# Altium PCB PCB1.PcbDoc (part 2 of 2)
Units mm, origin at the board's own origin, x right, y up, seen from the top; angles counter-clockwise.
Board outline 48 x 73.5 mm, 4 copper layers (Top Copper, Signal Layer 1, Signal Layer 2, Bottom Copper), stack 1.582 mm thick; 72 components, 51 nets, 278 pads, 725 vias.
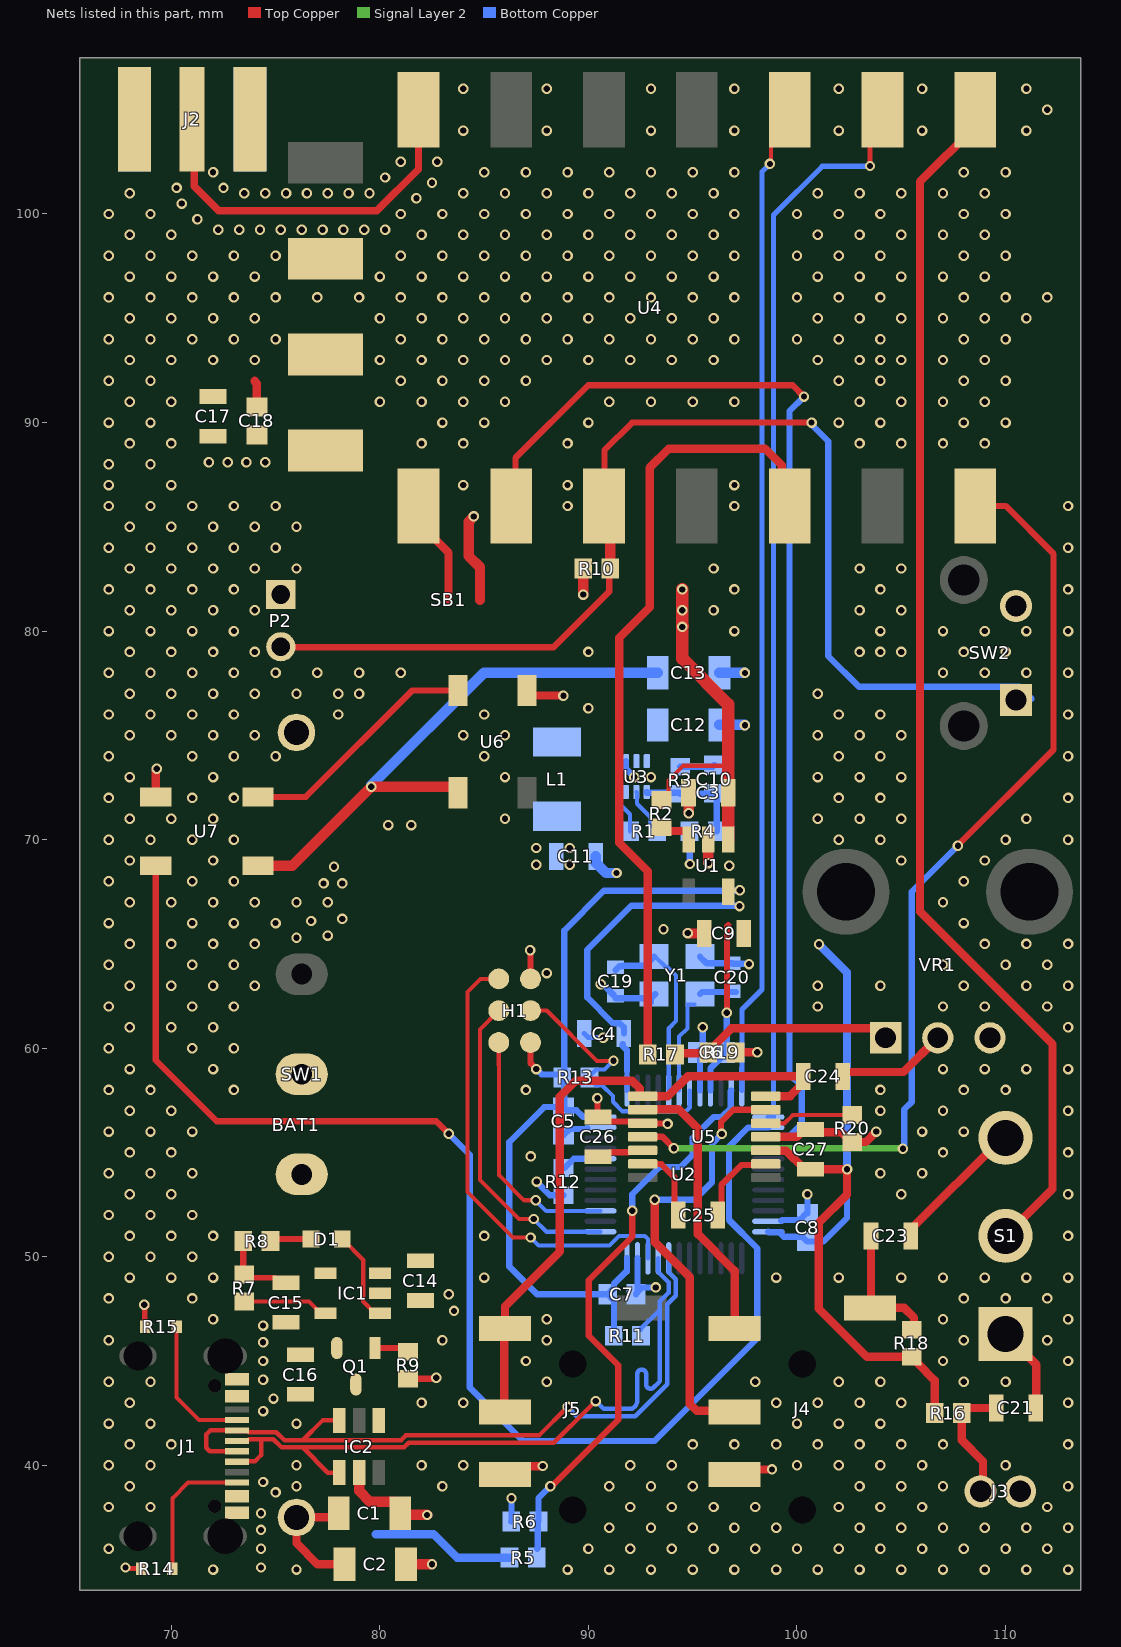
[diagram p4: the nets of this part, all layers, seen from the top]

## Via types
v1: diameter 0.5, hole 0.3, Top Copper to Bottom Copper, tented both sides, 725 vias

## Nets (pads, with @x,y where several pads share a name; then routed paths per layer and width w, separated by ;. In a path a pad name is that pad's centre, name@x,y a point inside that pad or via, vN(x,y) a via of type N, cw(c..) or ccw(c..) an arc to the next point about the centre after c; other vN are vias at no path point)
+3V3: C4.2 C5.2 C6.2 C7.2 C8.2 C9.2 C27.1 H1.1 R11.2 R13.2 R16.2 R18.1 U1.5 U2.1 U2.9 U2.24 U2.36 U2.48 U5.10 | length 103.7
  Top Copper w0.3: H1.1@87.224,60.276 87.224,59.276 v1(87.5,59) ; v1@96.639,61.707 96.639,65.839 96.7,65.9
  Top Copper w0.4: C9.2@97.336,65.85 97.336,65.764 C9.2@97.6,65.5 ; U5.10@98.51,55.09 99.46,55.09 100.35,54.2 C27.1@100.65,54.2 v1(102.4,54.2) 102.4,52.973 101.039,51.613 101.039,47.519 103.358,45.2 R18.1@105.5,45.2 ; R18.1@105.5,45.175 105.575,45.175 105.775,44.975 105.775,44.9 106.6,44.075 R16.2@106.6,42.5
  Bottom Copper w0.25: U2.1@91.85,57.975 91.85,58.9
  Bottom Copper w0.3: v1(87.5,59) 87.759,58.741 88.609,58.741 R13.2@88.75,58.6 ; U2.48@90.575,56.7 89.744,56.7 89.425,57.019 88.956,57.019 C5.2@88.8,57.175 ; R11.2@91.215,46.213 91.223,46.221 91.223,47.902 C7.2@90.925,48.2 ; C4.2@91.65,60.202 91.65,60.1 91.85,59.9 91.85,59.675 91.854,59.671 91.854,59.129 91.85,59.125 91.85,58.9 ; C4.2@91.7,60.7 91.7,61 91.5,61.2 91.171,61.2 89.938,62.433 89.938,64.713 92.062,66.836 97.22,66.836 v1(97.242,66.814) ; U2.36@91.85,49.925 91.85,49.325 91.225,48.7 91.225,48.5 C7.2@90.925,48.2 ; U2.9@95.85,57.975 95.85,59.025 96.575,59.75 C6.2@96.575,59.8 96.636,59.861 v1(96.636,61.704) ; v1(97.251,67.568) 97.227,67.544 90.744,67.544 88.838,65.638 88.838,58.65 88.838,57.213 C5.2@88.8,57.175 ; U2.24@98.625,51.2 98.65,51.175 99.25,51.175 99.25,51.077 99.364,50.963 100.262,50.963 C8.2@100.5,50.725 101.259,50.725 102.4,51.866 v1(102.4,54.2) ; C5.2@88.8,57.175 87.875,57.175 86.2,55.5 86.2,49.532 87.532,48.2 C7.2@90.925,48.2
  Bottom Copper w0.4: v1(101.056,64.978) 102.4,63.634 v1(102.4,54.2)
+5V: C3.2 C10.2 C12.2 C13.2 C17.2 C18.2 R2.1 R3.2 R10.2 U1.1 U3.6 U4.8 U6.1 U7.1 | length 47.4
  Top Copper w0.2: R2.1@93.5,71.9 93.506,71.9 93.831,72.225 93.831,72.831 94.54,73.54 96.7,73.54
  Top Copper w0.5: U7.1@74.15,68.75 75.803,68.75 v1(79.591,72.538) 83.55,72.538 83.75,72.338 U6.1@83.75,72.25 ; v1(89.75,81.75) R10.2@89.75,83
  Top Copper w0.6: v1(94.5,80.2) 94.5,78.682 96.7,76.482 96.7,73.54 C3.2@96.7,72.25 U1.1@96.7,70 ; v1(94.5,82) v1(94.5,81.004) 94.5,80.25 v1@94.525,80.225
  Bottom Copper w0.3: R3.2@94.4,73.5 95.958,73.5 C10.2@96.038,73.58
  Bottom Copper w0.5: v1(79.591,72.538) 79.591,72.599 84.992,78 C13.2@93.325,78
  other v1: 71.8,88.1 72.7,88.1 73.6,88.1 74.5,88.1
+VBATT: BAT1.1 C1.2 C2.2 C14.2 IC1.3 R5.2 SW1.3 | length 13.2
  Top Copper w0.4: C1.2@77.969,37.4 C1.2@78.19,37.62 ; C1.2@78.069,37.5 76.325,37.5 BAT1.1@76,37.5 76,36.268 77.018,35.25 C2.2@78.3,35.25
  Bottom Copper w0.4: 79.8,36.7 82.57,36.7 83.698,35.573 R5.2@86.218,35.573
+VUSB: C16.2 IC2.1 J1.A4-B9 J1.B4-A9 Q1.3
  other v1: 75,38.7 74.4,39.2 74.4,42.6 74.9,43.2
A_ATTEN: C24.1 J5.R1 J5.T U5.1 U5.14 | length 31.3
  Top Copper w0.4: J5.R1@85.959,42.594 85.959,46.509 J5.T@86,46.55 86,47.622 88.631,50.252 88.631,57.682 89.386,58.437 92.101,58.437 92.468,58.071 92.468,57.725 92.493,57.7 93.812,57.7 94.762,58.65 C24.1@100.15,58.65 ; U5.14@98.5,57.7 99.671,57.7 100.15,58.179 100.15,58.5 100.225,58.575 C24.1@100.3,58.65
ADC1_IN1: R5.1 R6.2 U2.11 | length 27.7
  Top Copper w0.3: v1@88.284,39.04 91.428,42.184 91.428,44.801 90.014,46.214 90.014,48.867 92.1,50.953 v1(92.1,52.2)
  Bottom Copper w0.3: R5.1@87.55,36 87.575,36.025 R6.2@87.575,37.3 ; R6.2@87.6,37.3 87.6,38.415 v1(88.176,38.992) ; v1(92.1,52.2) 92.1,53 93.4,54.3 94.4,54.3 95,54.9 95,55.7 96,56.7 96.4,56.7 96.825,57.125 96.825,57.95 U2.11@96.85,57.975
AMP_EN: U4.1 U5.4 | length 48.9
  Top Copper w0.3: U5.4@92.6,55.75 93.55,55.75 v1(94.1,55.2) ; v1@107.715,69.728 112.3,74.312 112.3,83.7 110,86 U4.1@108.55,86
  Signal Layer 2 w0.3: v1(94.1,55.2) 105.052,55.2 v1(105.079,55.173)
  Bottom Copper w0.3: v1(105.079,55.173) 105.117,55.211 105.117,55.352 105.146,55.381 105.146,57.065 105.503,57.421 105.503,67.495 v1(107.715,69.708)
ARGB_D: U2.14 U7.4 | length 66.3
  Top Copper w0.3: U7.4@69.25,68.75 69.25,59.425 72.174,56.501 82.699,56.501 v1(83.3,55.9)
  Bottom Copper w0.3: v1(83.3,55.9) 84.312,54.888 84.312,43.73 86.883,41.159 93.159,41.159 98.1,46.1 98.1,50.4 96.74,51.76 96.74,55.279 97.661,56.2 U2.14@98.625,56.2
BOOT0: R12.2 U2.44 | length 2
  Bottom Copper w0.3: R12.2@88.8,54.25 88.85,54.25 89.3,54.7 U2.44@90.575,54.7
CC1: J1.A5 R15.2 | length 6.8
  Top Copper w0.2: R15.2@70.25,46.65 70.25,43.25 71.33,42.17 J1.A5@73.155,42.17
CC2: J1.B5 R14.2 | length 6.8
  Top Copper w0.2: R14.2@70.05,35.05 70.05,38.415 70.805,39.17 J1.B5@73.155,39.17
D_N: IC2.3 J1.A7 J1.B7 U2.32 | length 34.5
  Top Copper w0.216: J1.A7@73.155,40.67 71.848,40.67 71.671,40.847 71.671,41.48 71.861,41.67 J1.B7@73.155,41.67 73.197,41.628 73.675,41.628 73.711,41.592 75.036,41.592 75.427,41.2 76.3,41.2 ; IC2.3@78.05,42.15 77.25,42.15 76.3,41.2 ; v1(89,42.8) 87.63,41.43 81.245,41.43 81.015,41.2 76.3,41.2
  Bottom Copper w0.216: v1(89,42.8) 89.445,42.355 90.636,42.355 90.638,42.357 92.242,42.357 93.772,43.886 93.772,47.719 94.184,48.131 94.184,48.923 93.867,49.24 93.867,49.249 93.85,49.266 U2.32@93.85,49.925
D_P: IC2.4 J1.A6 J1.B6 R11.1 U2.33 | length 35.9
  Top Copper w0.216: J1.B6@73.155,40.17 73.186,40.201 74.012,40.201 74.303,40.492 74.303,41.248 ; J1.A6@73.155,41.17 73.197,41.212 73.675,41.212 73.711,41.248 74.303,41.248 ; IC2.4@78.05,39.65 77.507,39.65 76.3,40.857 ; v1(90.348,43.079) 89.164,41.895 89.15,41.895 88.341,41.086 81.386,41.086 81.157,40.857 76.3,40.857 ; 74.303,41.248 74.894,41.248 75.285,40.857 76.3,40.857
  Bottom Copper w0.216: v1(90.348,43.079) 90.727,42.7 92.1,42.7 92.128,42.728 92.237,42.837 ccw(c91.98,43.092) 92.239,42.839 ccw(c91.98,43.092) 92.342,43.092 92.342,44.374 cw(c92.554,44.374) 92.554,44.586 cw(c92.554,44.374) 92.766,44.374 92.766,43.888 ccw(c92.982,43.888) 93.135,43.735 93.321,43.921 93.428,44.028 93.428,47.4 ; R11.1@92.508,46.489 92.508,46.539 93.369,47.4 93.428,47.4 ; U2.33@93.35,49.925 93.35,49.272 93.841,48.781 93.841,48.274 93.428,47.861 93.428,47.4
FET_Drain: C15.2 IC1.4 Q1.2 R7.1 R8.2 | length 3.6
  Top Copper w0.25: R7.1@73.5,49.15 73.656,48.994 74.956,48.994 75.1,48.85 C15.2@75.4,48.85
  Top Copper w0.3: R8.2@73.45,50.75 73.45,49.2 R7.1@73.5,49.15
FET_Gate: Q1.1 R9.2 | length 1.7
  Top Copper w0.2: R9.2@81.173,45.627 R9.2@81.35,45.45
  Top Copper w0.3: Q1.1@79.765,45.627 R9.2@81.173,45.627
GND: BAT1.2 C1.1 C2.1 C3.1 C4.1 C5.1 C6.1 C7.1 C8.1 C9.1 C11.1 C12.1 C13.1 C14.1 C15.1 C16.1 C17.1 C18.1 C19.1 C20.1 C26.2 C27.2 H1.3 IC1.2 IC2.5 J1.A1-B12 J1.B1-A12 J2.2 J2.3 J2.4 J2.5 J3.2 J4.R2 J5.R2 P2.1 R4.1 R6.1 R9.1 R12.1 R14.1 R15.1 R19.1 R20.1 SB1.3 SW2.2 U1.2 U2.8 U2.23 U2.35 U2.47 U3.4 U4.9 U4.10 U5.3 U5.11 U6.3 U7.3 VR1.3 Y1.2 Y1.4 | length 62.2
  Top Copper w0.25: v1(67.8,35.1) 67.85,35.05 R14.1@68.55,35.05 ; v1(68.7,47.7) 68.725,47.675 68.725,46.675 R15.1@68.75,46.65
  Top Copper w0.3: R9.1@81.35,44.15 82.65,44.15 v1(82.7,44.2) ; v1(87.2,64.7) 87.224,64.676 H1.3@87.224,63.324 ; v1(90.432,57.594) 90.432,56.718 C26.2@90.45,56.7 90.75,56.7 90.95,56.5 91.05,56.5 91.064,56.486 91.936,56.486 91.947,56.475 92.525,56.475 U5.3@92.6,56.4 92.616,56.384 93.778,56.384 v1(93.794,56.368)
  Top Copper w0.4: v1(68.7,47.7) v1@68.75,47.65 ; U7.3@69.25,72.05 69.25,73.35 v1(69.3,73.4) ; 74,92 74,91.973 74.1,91.873 C18.1@74.1,90.75 ; J5.R2@86,39.55 86.4,39.95 87.796,39.95 v1(87.811,39.965) ; U6.3@87.05,77.15 87.288,76.912 v1@88.788,76.912 ; R19.1@97.05,59.8 v1(98.1,59.8) ; J4.R2@97.493,39.393 97.9,39.8 v1(98.802,39.8) ; U5.11@98.501,55.749 99.999,55.749 100.35,56.1 C27.2@100.65,56.1 100.784,55.966 102.134,55.966 102.6,55.5 R20.1@102.65,55.5 103.3,55.5 v1(103.8,56)
  Top Copper w0.5: IC2.5@79,39.65 79,38.772 79.522,38.25 80.7,38.25 80.975,37.975 C1.1@80.975,37.7 ; C1.1@81.14,37.62 82.258,37.62 v1(82.263,37.614) ; C2.1@81.25,35.25 v1(82.5,35.25) ; v1(84.5,85.5) 84.254,85.254 84.254,83.6 84.8,83.054 SB1.3@84.8,81.5 ; v1(94.763,65.518) 94.781,65.5 C9.1@95.55,65.5 ; C3.1@94.8,72.25 94.8,71.266 v1(94.804,71.262) ; U1.2@95.75,70 95.75,68.883 v1(95.758,68.875)
  Bottom Copper w0.25: C4.1@89.8,60.7 89.987,60.513 90.687,60.513 v1(90.7,60.5)
  Bottom Copper w0.3: R6.1@86.3,37.3 86.305,37.305 86.305,38.413 v1(86.31,38.418) ; v1(87.516,53.604) 87.516,53.582 88.148,52.95 R12.1@88.8,52.95 ; C5.1@88.8,55.825 89.1,56.125 89.9,56.125 U2.47@89.95,56.175 ; v1(90.595,63.076) 90.633,63.038 90.712,63.038 C19.1@91.225,62.525 ; C19.1@91.3,62.4 Y1.2@92.8,62.4 ; U3.4@91.8,73.765 91.8,73.4 v1(92.2,73) ; C7.1@92.275,48.2 92.275,48.227 C7.1@92.35,48.302 ; U2.35@92.35,49.925 C7.1@92.35,48.302 ; Y1.2@92.9,62.3 93,62.2 93,62.4 Y1.2@93.2,62.6 ; v1(93.229,48.527) 92.575,48.527 C7.1@92.35,48.302 ; R4.1@94.85,70.4 94.858,70.392 94.858,68.84 v1(94.865,68.833) ; Y1.4@95.344,64.393 95.662,64.075 96.332,64.075 C20.1@96.9,64.075 ; U2.8@95.35,57.975 95.35,59.675 C6.1@95.225,59.8 95.476,60.051 v1(95.476,61.008) ; C20.1@96.915,64.06 96.92,64.055 97.679,64.055 v1(97.7,64.035) ; U2.23@99.25,51.725 99.292,51.767 100.036,51.767 100.044,51.775 100.15,51.775 100.45,52.075 C8.1@100.5,52.075 v1(100.5,53)
  Bottom Copper w0.5: C11.1@90.35,69.2 90.35,68.9 90.851,68.399 v1(91.349,68.399) ; C12.1@96.275,75.5 97.487,75.5 v1(97.504,75.483) ; C13.1@96.275,78 97.498,78 v1(97.504,77.994)
  other v1: 72,35 76,35 89,35 91,35 93,35 95,35 97,35 99,35 101,35 103,35 105,35 107,35 109,35 111,35 113,35 74.3,35.1 67,36 74.3,36 90,36 92,36 94,36 96,36 98,36 100,36 102,36 104,36 106,36 108,36 110,36 112,36 74.3,36.9 91,37 93,37 95,37 97,37 99,37 103,37 105,37 107,37 109,37 111,37 113,37 74.3,37.7 67,38 69,38 92,38 94,38 96,38 98,38 102,38 104,38 106,38 112,38 68,39 76,39 83,39 91,39 93,39 95,39 103,39 105,39 107,39 113,39 67,40 69,40 76,40 82,40 84,40 92,40 94,40 100,40 102,40 104,40 106,40 110,40 68,41 70,41 95,41 97,41 99,41 101,41 103,41 105,41 107,41 113,41 67,42 69,42 76,42 100,42 102,42 104,42 68,43 82,43 84,43 99,43 101,43 103,43 105,43 113,43 67,44 69,44 88,44 98,44 102,44 104,44 108,44 110,44 74.4,44.1 74.4,45 87,45 107,45 113,45 74.4,45.9 67,46 83,46 88,46 108,46 112,46 74.4,46.7 72,47 88,47 107,47 113,47 83.554,47.4 67,48 71,48 108,48 110,48 112,48 83.3,48.2 68,49 70,49 72,49 85,49 99,49 102,49 105,49 107,49 109,49 111,49 113,49 67,50 69,50 71,50 68,51 70,51 72,51 85,51 113,51 67,52 69,52 71,52 68,53 70,53 105,53 113,53 67,54 69,54 71,54 104,54 106,54 87.227,54.808 68,55 70,55 107,55 113,55 67,56 69,56 71,56 106,56 108,56 68,57 70,57 104,57 107,57 113,57 67,58 69,58 73,58 87,58 104,58 108,58 110,58 68,59 72,59 107,59 109,59 111,59 113,59 67,60 71,60 73,60 68,61 70,61 72,61 113,61 67,62 71,62 73,62 101,62 107,62 109,62 112,62 68,63 70,63 72,63 74,63 101,63 104,63 108,63 111,63 113,63 88,63.6 67,64 71,64 73,64 107,64 110,64 112,64 68,65 70,65 72,65 74,65 109,65 111,65 113,65 76,65.3 77.5,65.4 93.6,65.7 67,66 71,66 73,66 75,66 108,66 76.7,66.1 78.2,66.2 68,67 70,67 72,67 74,67 76,67 77.5,67 107,67 77.3,67.9 78.2,67.9 67,68 71,68 73,68 108,68 77.8,68.7 96.75,68.75 68,69 72,69 105,69 109,69 67,70 69,70 71,70 73,70 102,70 104,70 110,70 113,70 80.4,70.7 81.5,70.7 68,71 70,71 72,71 86,71 101,71 103,71 105,71 111,71 67,72 71,72 73,72 102,72 104,72 113,72 68,73 72,73 86,73 93,73 101,73 103,73 105,73 67,74 71,74 73,74 75,74 85,74 102,74 104,74 113,74 68,75 70,75 72,75 74,75 84,75 86,75 101,75 103,75 105,75 67,76 69,76 71,76 73,76 78,76 85,76 102,76 104,76 113,76 90,76.3 88.8,76.9 68,77 70,77 72,77 74,77 76,77 78,77 79,77 101,77 67,78 69,78 71,78 73,78 75,78 77,78 79,78 81,78 107,78 109,78 111,78 113,78 68,79 70,79 72,79 74,79 90,79 103,79 104,79 105,79 108,79 110,79 67,80 69,80 71,80 73,80 97,80 104,80 107,80 109,80 111,80 113,80 68,81 70,81 72,81 74,81 96,81 103,81 105,81 67,82 69,82 71,82 73,82 97,82 104,82 113,82 68,83 70,83 72,83 74,83 76,83 96,83 103,83 105,83 67,84 69,84 71,84 73,84 75,84 113,84 68,85 70,85 72,85 74,85 76,85 67,86 69,86 71,86 73,86 75,86 89,86 97,86 113,86 67,87 70,87 84,87 89,87 97,87 67,88 69,88 68,89 70,89 82,89 84,89 89,89 103,89 105,89 107,89 109,89 67,90 69,90 83,90 85,90 90,90 102,90 104,90 108,90 110,90 68,91 70,91 80,91 82,91 84,91 86,91 91,91 93,91 95,91 97,91 103,91 105,91 107,91 109,91 67,92 69,92 81,92 83,92 85,92 87,92 102,92 104,92 108,92 110,92 68,93 70,93 72,93 74,93 80,93 82,93 84,93 86,93 88,93 90,93 92,93 94,93 96,93 101,93 103,93 104,93 105,93 107,93 109,93 67,94 69,94 71,94 73,94 75,94 81,94 83,94 85,94 87,94 89,94 91,94 93,94 95,94 97,94 100,94 102,94 104,94 108,94 110,94 68,95 70,95 72,95 74,95 80,95 82,95 84,95 86,95 88,95 90,95 92,95 94,95 96,95 101,95 103,95 105,95 107,95 109,95 111,95 67,96 69,96 71,96 73,96 75,96 77,96 79,96 81,96 83,96 85,96 87,96 89,96 91,96 93,96 95,96 97,96 100,96 102,96 104,96 108,96 110,96 112,96 68,97 70,97 72,97 74,97 80,97 82,97 84,97 86,97 88,97 90,97 92,97 94,97 96,97 101,97 103,97 105,97 107,97 109,97 67,98 69,98 71,98 73,98 75,98 81,98 83,98 85,98 87,98 89,98 91,98 93,98 95,98 97,98 100,98 102,98 104,98 108,98 110,98 68,99 70,99 82,99 84,99 86,99 88,99 90,99 92,99 94,99 96,99 101,99 103,99 105,99 107,99 109,99 72.25,99.25 73.25,99.25 74.25,99.25 75.25,99.25 76.25,99.25 77.25,99.25 78.25,99.25 79.25,99.25 80.25,99.25 71.25,99.75 67,100 69,100 81,100 83,100 85,100 87,100 89,100 91,100 93,100 95,100 97,100 100,100 102,100 104,100 108,100 110,100 70.5,100.5 81.75,100.75 68,101 73.5,101 74.5,101 75.5,101 76.5,101 77.5,101 78.5,101 79.5,101 84,101 86,101 88,101 90,101 92,101 94,101 96,101 101,101 103,101 105,101 107,101 109,101 70.25,101.25 72.5,101.25 82.5,101.5 80.25,101.75 72,102 85,102 87,102 89,102 91,102 93,102 95,102 97,102 108,102 110,102 81,102.5 82.75,102.5 84,104 88,104 93,104 97,104 102,104 106,104 111,104 112,105 84,106 88,106 93,106 97,106 102,106 106,106 111,106
MIC: S1.2 U4.18 | length 58.7
  Top Copper w0.4: U4.18@108.55,105 108.55,104.2 105.9,101.55 105.9,66.546 112.25,60.196 112.25,53.25 S1.2@110,51
MIC_JACK: C23.2 S1.3 | length 6.7
  Top Copper w0.4: C23.2@105.45,51 105.45,51.3 109.85,55.7 S1.3@110,55.7
MIC_OnBoard: C21.2 S1.1 | length 4.1
  Top Copper w0.4: S1.1@110,46.3 111.473,44.827 C21.2@111.473,42.773
NetC10_1: C10.1 R3.1 R4.2 U3.1 | length 5.2
  Bottom Copper w0.3: U3.1@92.8,72.285 92.8,72.242 94.357,72.242 R3.1@94.4,72.2 96.008,72.2 C10.1@96.038,72.23 96.15,72.117 R4.2@96.15,70.4
NetC21_1: C21.1 J3.1 R16.1 | length 6
  Top Copper w0.4: J3.1@108.8,38.75 108.916,38.866 108.916,40.191 107.9,41.207 R16.1@107.9,42.5 107.9,42.525 108.125,42.75 C21.1@109.55,42.75
NetC23_1: C23.1 J4.S R18.2 | length 6.4
  Top Copper w0.4: C23.1@103.55,51 103.55,47.6 J4.S@103.5,47.55 105.143,47.55 105.612,47.081 105.612,46.612 R18.2@105.5,46.5
NetC24_2: C24.2 VR1.2 | length 5.4
  Top Copper w0.4: C24.2@102.2,58.65 102.2,58.708 102.35,58.858 105.108,58.858 VR1.2@106.75,60.5
NetC25_1: C25.1 U5.9 | length 4.1
  Top Copper w0.3: C25.1@96.2,52 96.378,52.178 96.378,53.439 97.335,54.396 98.446,54.396 U5.9@98.5,54.45
NetC25_2: C25.2 U5.6 | length 3.7
  Top Copper w0.3: U5.6@92.607,54.443 93.495,54.443 94.123,53.816 94.123,52.177 C25.2@94.3,52
NetC26_1: C26.1 U5.5 | length 2.3
  Top Copper w0.3: C26.1@90.45,54.8 90.75,54.8 90.95,55 91.057,55 91.064,55.007 91.936,55.007 91.955,55.025 92.525,55.025 U5.5@92.6,55.1
NetD1_1: D1.1 R8.1 | length 2
  Top Copper w0.3: R8.1@74.75,50.75 74.85,50.85 D1.1@76.7,50.85
NetD1_2: D1.2 IC1.1 | length 4.4
  Top Copper w0.2: D1.2@78.2,50.85 79.201,49.849 79.201,47.849 79.75,47.3 IC1.1@80,47.3
NetIC1_5: IC1.5 R7.2 | length 4.1
  Top Copper w0.2: R7.2@73.5,47.85 76.6,47.85 77.15,47.3 IC1.5@77.4,47.3
NetJ2_1: J2.1 U4.12 | length 18.4
  Top Copper w0.347: J2.1@71,104.8 71.1,104.7 71.1,101.332 72.278,100.154 79.854,100.154 81.85,102.15 U4.12@81.85,105
NetJ4_R1: J4.R1 U5.13 | length 21.4
  Top Copper w0.3: v1(96.388,55.89) 96.351,55.927 96.351,56.455 96.946,57.05 U5.13@98.5,57.05
  Top Copper w0.4: v1(93.179,52.732) 93.179,50.705 94.859,49.025 94.859,42.947 95.198,42.608 96.942,42.608 J4.R1@97,42.55
  Bottom Copper w0.3: v1(93.179,52.732) 95.093,52.732 95.925,53.564 95.925,55.428 v1(96.388,55.89)
NetJ4_T: J4.T U5.2 | length 13.5
  Top Copper w0.4: U5.2@92.624,57.074 94.313,57.074 95.246,56.141 95.246,51.083 97.008,49.321 J4.T@97.008,46.367
NetL1_2: L1.2 U3.5
NetR1_2: R1.2 U3.2 | length 2.3
  Bottom Copper w0.2: U3.2@92.3,72.285 92.328,72.257 92.328,71.722 92.975,71.075 92.975,70.725 R1.2@93.3,70.4
NetR2_2: R2.2 U1.3 | length 1.7
  Top Copper w0.4: R2.2@93.5,70.6 93.685,70.415 94.7,70.415 94.8,70.315 U1.3@94.8,70
NetR17_1: R17.1 R19.2 VR1.1 | length 10.8
  Top Copper w0.4: R17.1@94.15,59.7 94.2,59.75 95.7,59.75 R19.2@95.75,59.8 ; R19.2@95.75,59.85 96.852,60.952 103.798,60.952 VR1.1@104.25,60.5
NetR20_2: R20.2 U5.12 | length 4.3
  Top Copper w0.2: U5.12@98.5,56.4 99.4,56.4 99.8,56.8 R20.2@102.65,56.8
NetU6_4: U6.4 U7.2 | length 11.7
  Top Copper w0.3: U7.2@74.15,72.05 76.45,72.05 81.55,77.15 U6.4@83.75,77.15
NRST: H1.2 R13.1 U2.7 | length 12.9
  Top Copper w0.2: H1.2@87.224,61.8 88,61.8 90.411,59.389 v1@91.131,59.389
  Bottom Copper w0.2: R13.1@90.05,58.6 90.05,58.55 90.375,58.225 90.655,58.225 91.177,57.702 91.177,57.431 91.637,56.972 94.665,56.972 94.856,57.164 94.856,57.969 U2.7@94.85,57.975 ; R13.1@90.05,58.65 90.375,58.975 90.775,58.975 v1(91.2,59.4)
PTT: P2.2 R10.1 SW2.1 U4.5 | length 56.4
  Top Copper w0.3: P2.2@75.25,79.25 75.276,79.224 88.324,79.224 91,81.9 91,82.95 R10.1@91.05,83 ; U4.5@90.768,86.018 90.768,88.668 92.1,90 v1(100.7,90)
  Top Copper w0.5: U4.5@90.75,86 91.05,85.7 R10.1@91.05,83
  Bottom Copper w0.3: v1(100.7,90) 100.7,89.9 101.5,89.1 101.5,78.8 102.973,77.327 110.673,77.327 SW2.1@111.25,76.75
PWR_Switch: C11.2 L1.1 R1.1 SW1.1 U3.3 | length 1.9
  Bottom Copper w0.2: 91.461,72.1 91.461,71.757 92,71.218 R1.1@92,70.4
  other v1: 87.5,68.8 89.1,68.8 87.5,69.6 89.1,69.6
RX2: U2.13 U4.17 | length 52
  Top Copper w0.25: v1(103.5,102.3) 103.5,104.4 U4.17@104.1,105
  Bottom Copper w0.25: U2.13@98.625,56.7 98.877,56.7 98.877,99.949 101.213,102.285 103.485,102.285 v1(103.5,102.3)
SA818_A_OUT: R17.2 U4.3 | length 38.5
  Top Copper w0.4: R17.2@92.85,59.7 92.85,68.479 91.482,69.848 91.482,79.683 92.937,81.138 92.937,87.832 93.855,88.75 98.47,88.75 99.274,87.946 99.274,86.376 U4.3@99.65,86
SA818_EN: U2.15 U4.6 | length 55.2
  Top Copper w0.3: U4.6@86.3,86 86.5,86.2 86.5,88.3 89.989,91.789 99.792,91.789 v1(100.335,91.246)
  Bottom Copper w0.3: U2.15@98.625,55.7 99.565,55.7 100.229,56.364 100.229,58.171 99.639,58.761 99.639,90.55 v1(100.335,91.246)
SA818_PWR: SB1.2 U4.7 | length 5.1
  Top Copper w0.4: U4.7@81.85,86 81.85,85.2 83.286,83.764 83.286,81.514
SWCLK: H1.5 U2.37 | length 15.3
  Top Copper w0.2: H1.5@85.7,61.8 84.8,60.9 84.8,53.675 86.664,51.81 v1(87.374,51.81)
  Bottom Copper w0.2: v1(87.374,51.81) 87.984,51.2 U2.37@90.575,51.2
SWDIO: H1.4 U2.34 | length 21.9
  Top Copper w0.2: H1.4@85.376,63.324 84.824,63.324 84.2,62.7 84.2,53.1 86.377,50.923 v1(87.224,50.923)
  Bottom Copper w0.2: v1(87.224,50.923) 87.615,50.532 91.001,50.532 91.469,51 92.7,51 92.85,50.85 U2.34@92.85,49.925
SWO: H1.6 U2.39 | length 11.9
  Top Copper w0.2: H1.6@85.7,60.276 85.7,59.2 85.713,59.187 85.713,53.91 86.918,52.705 v1(87.468,52.705)
  Bottom Copper w0.2: v1(87.468,52.705) 87.974,52.2 90.566,52.2 U2.39@90.57,52.195
TX2: U2.12 U4.16 | length 48
  Top Copper w0.2: v1(98.7,102.4) 98.75,102.45 98.75,104.1 U4.16@99.65,105
  Bottom Copper w0.25: U2.12@97.35,57.975 97.35,59.05 97.358,59.058 97.358,61.85 98.329,62.821 98.329,102.029 v1(98.7,102.4)
XTAL3_IN: C19.2 U2.5 Y1.3 | length 9.1
  Bottom Copper w0.2: Y1.3@93.2,64.399 93.706,63.893 93.797,63.893 94.202,63.488 94.202,61.305 93.85,60.953 U2.5@93.85,57.975
  Bottom Copper w0.3: C19.2@91.3,63.75 91.475,63.925 91.636,63.925 91.664,63.953 92.704,63.953 Y1.3@93.144,64.393
XTAL3_OUT: C20.2 U2.6 Y1.1 | length 6.4
  Bottom Copper w0.2: U2.6@94.35,57.975 94.35,60.556 94.744,60.951 94.744,62.093 Y1.1@95.089,62.093
  Bottom Copper w0.3: Y1.1@95.344,62.593 95.441,62.69 C20.2@97.071,62.69
pads on no net: IC2.2 IC2.6 J1. J1.1 J1.2 J1.3 J1.4 J1.A8 J1.B8 J4.7 J4.8 J5.7 J5.8 J5.S SB1.1 SW1.2 SW2.3 SW2.4 U1.4 U2.2 U2.3 U2.4 U2.10 U2.16 U2.17 U2.18 U2.19 U2.20 U2.21 U2.22 U2.25 U2.26 U2.27 U2.28 U2.29 U2.30 U2.31 U2.38 U2.40 U2.41 U2.42 U2.43 U2.45 U2.46 U4.2 U4.4 U4.11 U4.13 U4.14 U4.15 U5.7 U5.8 U6.2 VR1.MH1 VR1.MH2

## Polygon pours and split planes (outlines as drawn)
+VBATT on Top Copper "+VBATT_L01_P009" (solid, pour order 9): 79.5,48.9 79.5,52 74.1,52 74.1,55.9 82.7,55.9 82.7,48.9
GND on Top Copper "GND_L01_P021" (solid, remove dead copper, pour order 21): 66.5,35 113,35 113,107 66.5,107 66.5,106.5 66.5,107 66.5,106.5
+VUSB on Top Copper "+VUSB_L01_P005" (solid, pour order 5): 74,43.5 74,42.2 75.3,42.2 75.3,43.5
+3V3 on Top Copper "+3V3_L01_P018" (solid, pour order 18): 96.4,68.137 96.4,64.5 104.1,64.5 104.1,68.137
+5V on Top Copper "+5V_L01_P014" (solid, pour order 14): 79.1,89.9 70.9,89.9 70.9,87.3 79.3,87.3 79.3,89.9 79,89.9
PWR_Switch on Top Copper "PWR_SWITCH_L01_P010" (solid, pour order 10): 74.2,57 83.3,57 83.3,66 90,66 90,70 79.1,70 79.1,60.9 74.2,60.9
GND on Top Copper "GND_L01_P008" (solid, pour order 8): 83.6,48.5 83.6,47.1 81.2,47.1 81.2,47.9 81.1,48 79.5,48 79.5,48.5
FET_Drain on Top Copper "FET_DRAIN_L01_P006" (solid, pour order 6): 77.6,46.3 78.127,46.3 78.127,48.8 76.6,48.8 76.6,49.6 78.9,49.6 78.9,44.9 77.6,44.9
FET_Drain on Top Copper "FET_DRAIN_L01_P007" (solid, pour order 7): 74.8,49.6 77.2,49.6 77.2,48.4 74.8,48.4
+VUSB on Top Copper "+VUSB_L01_P003" (solid, pour order 3): 72.576,38.822 74,38.822 74,39.7 75.3,39.7 75.3,38.229 72.576,38.229
GND on Top Copper "GND_L01_P001" (solid, pour order 1): 72.6,43.82 74.9,43.82 74.9,44.1 76.6,44.1 76.6,47.2 72.6,47.2
+VUSB on Top Copper "+VUSB_L01_P002" (solid, pour order 2): 72.578,43.619 75.1,43.619 75.1,43.9 76.8,43.9 76.8,44.5 80.3,44.5 80.3,41.6 79.5,41.6 79.5,43.02 72.578,43.02
GND on Top Copper "GND_L01_P000" (solid, pour order 0): 74.9,38.025 74.9,34.8 72.6,34.8 72.6,38.025
GND on Bottom Copper "GND_L04_P022" (solid, remove dead copper, pour order 22): 66.5,35 113,35 113,107 66.5,107 66.5,106.5 66.5,107 66.5,106.5
+VUSB on Bottom Copper "+VUSB_L04_P004" (solid, pour order 4): 74,43.6 75.3,43.6 75.3,38.4 74,38.4
+5V on Bottom Copper "+5V_L04_P013" (solid, pour order 13): 92.65,73.45 92.65,78.9 94.925,78.9 94.925,73.45
+5V on Bottom Copper "+5V_L04_P016" (solid, pour order 16): 70.75,89.75 70.75,87 76.75,87 76.75,80.25 92.5,80.25 92.5,77.75 95,77.75 95,83.5 80.5,83.5 80.5,89.75
PWR_Switch on Bottom Copper "PWR_SWITCH_L04_P011" (solid, pour order 11): 91.949,72.6 90.1,72.6 89.4,71.9 87.3,71.9 87.3,70.3 87.1,70.1 87.1,68.5 89.7,68.5 89.7,70 89.7,71 90.6,71.9 91.949,71.9
+VBATT on Bottom Copper "+VBATT_L04_P017" (solid, pour order 17): 75.4,38.5 76.5,38.5 76.5,50.25 72.5,50.25 72.5,56 80.25,56 80.25,36.5 80,36.25 75.4,36.25
NetL1_2 on Bottom Copper "NETL1_2_L04_P012" (solid, pour order 12): 87.3,75.5 87.3,73.9 92.458,73.9 92.458,74.8 90.3,74.8 90.3,75.5
GND on Signal Layer 1 "GND_L02_P019" (solid, pour order 19): 65,108 65,33.5 114.5,33.5 114.5,108
GND on Signal Layer 2 "GND_L03_P020" (solid, pour order 20): 65,108 65,33.5 114.5,33.5 114.5,108

## Other copper
Bottom Copper:
  pour cut-out: 90.504,75.004 90.504,75.5 87.3,75.5 87.3,70.3 87.1,70.1 87.1,68.5 89.55,68.5 89.55,70.05 89.7,70.05 89.7,71 89.998,71 90,71.002 90,68.1 86.287,68.1 86.313,75.9 90.8,75.9 90.8,75 90.508,75
  pour cut-out: 87.222,73.712 87.134,73.623 87.134,72.01 89.222,72.01 90.912,73.7 87.234,73.7

## Silkscreen, mask and mechanical layers (free items; w line width, h text height)
Top Overlay:
  circle w0.3: c85.2,59.1 r0.141
  lines w0.1: 78.2,61 84.9,61 ; 78.25,62.6 84.9,62.6 ; 81.539,59.5 81.55,59.511 81.55,64.1 ; 78.2,59.5 78.5,59.5 84.9,59.5 84.9,64.1 78.2,64.1 78.2,61.2 78.2,59.8 78.2,59.5
  text "ANT" at 67.26,100.26 h1
  text "PTT Connector" at 66.372,84.662 h1
  text "0.5W" at 85.76,80.96 h1
  text "1W" at 79.16,80.86 h1
  text "TX PWR" at 80.66,79.06 h1
  text "PTT" at 105.04,77.675 h1 r90
  text "Volume" at 101.86,73.46 h1
  text "RSSI LED" at 68.222,73.377 h1
  text "VBATT LED" at 81.16,69.16 h1
  text "OFF" at 67.2,65.7 h1.5
  text "DIO" at 78.677,62.836 h1
  text "GND" at 81.828,62.836 h1
  text "RST" at 81.978,61.278 h1
  text "CLK" at 78.568,61.273 h1
  text "SWO" at 78.554,59.737 h1
  text "3V3" at 82.007,59.742 h1
  text "ON" at 67.2,50.2 h1.5
  text "Speaker" at 96.96,49.093 h1
  text "Headphone" at 84.715,49.079 h1
  text "MIC" at 104.86,39.96 h1
Bottom Overlay:
  circle w0.3: c88,78 r2
  circle w0.3: c88.302,40.403 r2
  lines w0.3: 87.302,40.403 89.302,40.403 ; 88,77 88,79 ; 88.302,39.403 88.302,41.403
  text "External" at 113.04,57.86 h1
  text "MIC Switch" at 106.24,55.44 h1 r90
  text "Internal" at 112.94,43.16 h1
Mechanical 1:
  the board outline again, w0.17